# Altium PCB Route_Guide_and_Tuning.PcbDoc (part 6 of 8)
Units mil, origin at the board's own origin, x right, y up, seen from the top; angles counter-clockwise.
Board outline 3600 x 2300 mil, 14 copper layers (L1 TOP, L2_G, L3 SIG, L4_G, L4 SIG, L6_P, L7_G, L10_P, L11_P, L7 SIG, L13_P, L8 SIG, L15_G, L10 BOT), stack 89.291 mil thick; 4 components, 1934 nets, 2174 pads, 2165 vias.
Unrouted connection lines stored in the file: 123.
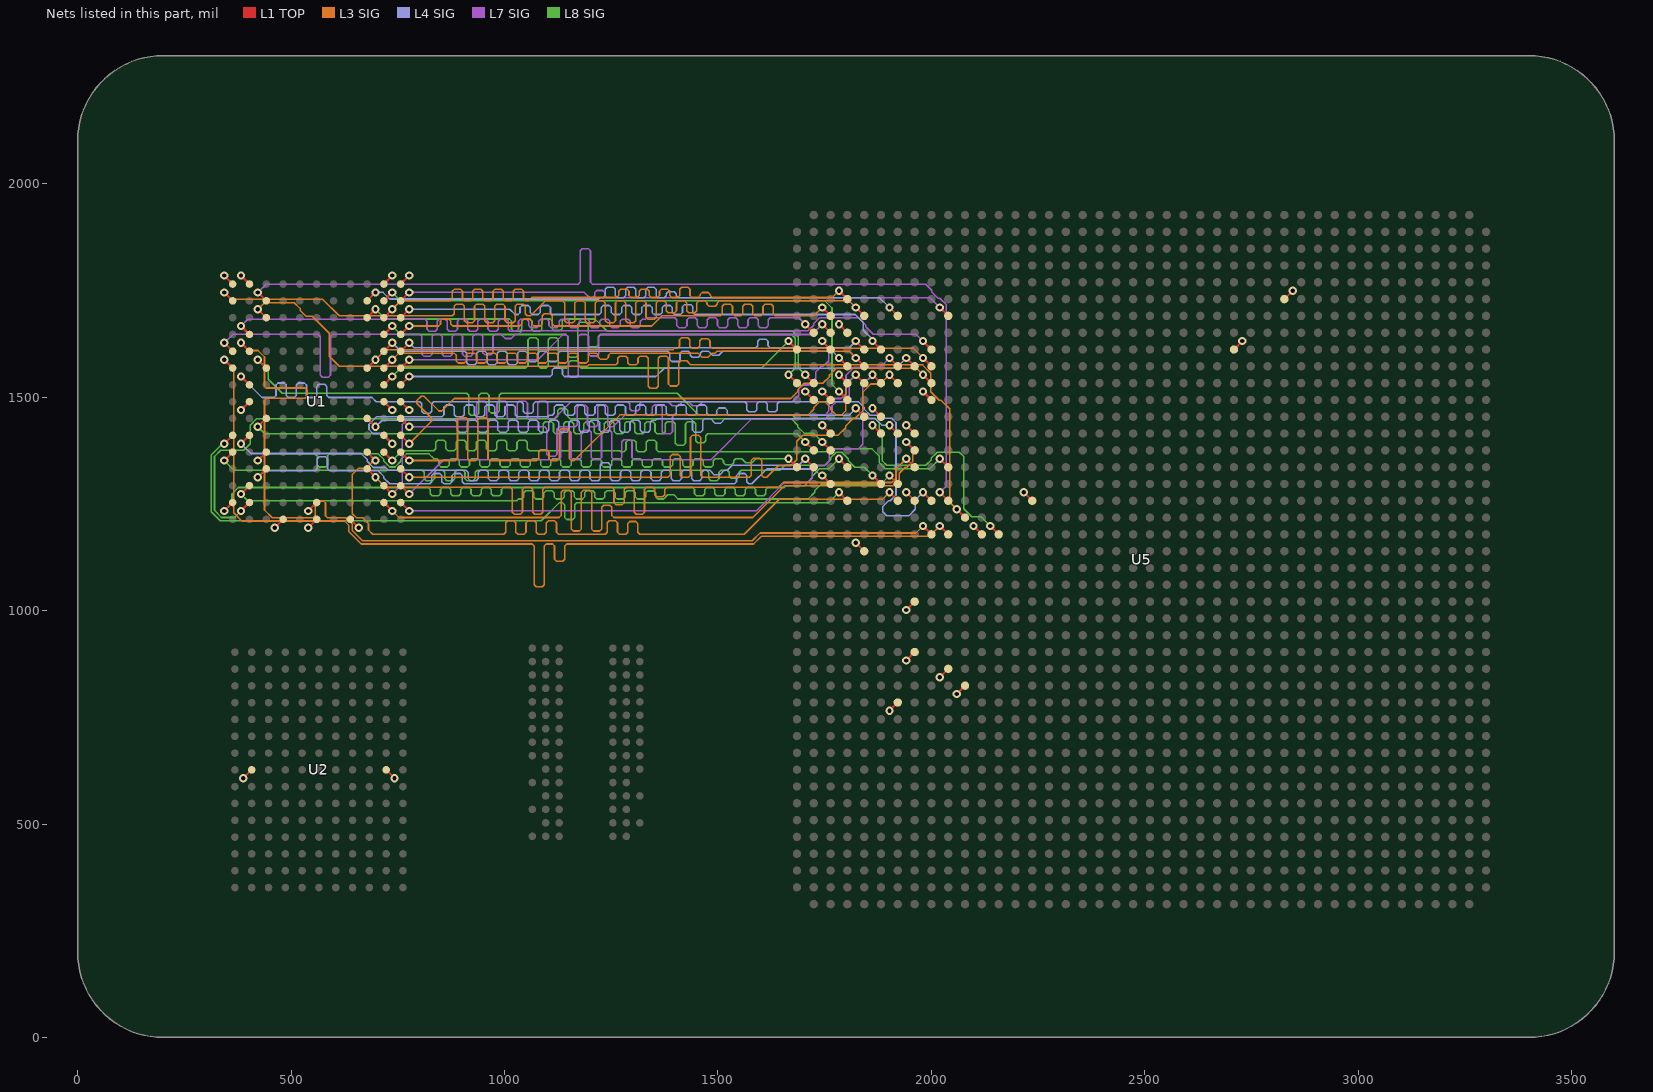
[diagram p18: the nets of this part, all layers, seen from the top]

## Via types
v1: diameter 19.4, hole 10, L1 TOP to L10 BOT, 2087 vias
v2: diameter 18.6, hole 10, L1 TOP to L10 BOT, tented both sides, 78 vias

## Nets (pads, with @x,y where several pads share a name; then routed paths per layer and width w, separated by ;. In a path a pad name is that pad's centre, name@x,y a point inside that pad or via, vN(x,y) a via of type N, cw(c..) or ccw(c..) an arc to the next point about the centre after c; other vN are vias at no path point) (continued)
QDR1.D26: U1.N2 U5.D37 | length 1428.9
  L1 TOP w5: U1.N2@717.6,1686.18 v1(737.28,1705.87) ; v1(1783.58,1749.29) U5.D37@1803.27,1729.61
  L3 SIG w3.8: v1(737.28,1705.87) 756.97,1725.55 873.21,1725.55 877.97,1730.31 877.97,1748.29 882.73,1753.05 897.01,1753.05 901.77,1748.29 901.77,1730.31 906.53,1725.55 920.81,1725.55 925.57,1730.31 925.57,1748.29 930.33,1753.05 944.61,1753.05 949.37,1748.29 949.37,1730.31 954.13,1725.55 968.41,1725.55 973.17,1730.31 973.17,1748.29 977.93,1753.05 992.21,1753.05 996.97,1748.29 996.97,1730.31 1001.73,1725.55 1016.01,1725.55 1020.77,1730.31 1020.77,1748.29 1025.53,1753.05 1039.81,1753.05 1044.57,1748.29 1044.57,1730.31 1049.33,1725.55 1056.47,1725.55 1064.26,1733.34 1263.07,1733.34 1267.83,1738.1 1267.83,1748.29 1272.59,1753.05 1286.87,1753.05 1291.63,1748.29 1291.63,1738.1 1296.39,1733.34 1310.67,1733.34 1315.43,1738.1 1315.43,1748.29 1320.19,1753.05 1334.47,1753.05 1339.23,1748.29 1339.23,1738.1 1343.99,1733.34 1358.27,1733.34 1363.03,1738.1 1363.03,1748.29 1367.79,1753.05 1382.07,1753.05 1386.83,1748.29 1386.83,1738.1 1391.59,1733.34 1405.87,1733.34 1410.63,1738.1 1410.63,1752.34 1415.39,1757.1 1429.67,1757.1 1434.43,1752.34 1434.43,1738.1 1439.19,1733.34 1453.47,1733.34 1458.23,1738.1 1458.23,1740.37 1462.99,1745.13 1477.27,1745.13 1482.03,1740.37 1482.03,1738.1 1486.79,1733.34 1767.63,1733.34 v1(1783.58,1749.29)
QDR1.D27: U1.C1 U5.E32 | length 1708.8
  L1 TOP w5: U1.C1@756.97,1292.48 v1(776.65,1272.79) ; v1(1822.95,1552.44) U5.E32@1842.64,1532.76
  L7 SIG w3.8: v1(776.65,1272.79) 857.42,1353.56 1127.27,1353.56 1132.03,1358.32 1132.03,1417.91 1136.79,1422.67 1151.07,1422.67 1155.83,1417.91 1155.83,1358.32 1160.59,1353.56 1174.87,1353.56 1179.63,1358.32 1179.63,1417.91 1184.39,1422.67 1198.67,1422.67 1203.43,1417.91 1203.43,1358.32 1208.19,1353.56 1222.47,1353.56 1227.23,1358.32 1227.23,1417.91 1231.99,1422.67 1246.27,1422.67 1251.03,1417.91 1251.03,1358.32 1255.79,1353.56 1270.07,1353.56 1274.83,1358.32 1274.83,1395.36 1279.59,1400.12 1293.87,1400.12 1298.63,1395.36 1298.63,1358.32 1303.39,1353.56 1483.57,1353.56 1579.73,1449.73 1752.77,1449.73 1767.21,1464.18 1767.21,1479.11 1777.21,1489.11 1792.15,1489.11 1807.54,1504.51 1807.54,1537.03 v1(1822.95,1552.44)
QDR1.D28: U1.D1 U5.G32 | length 1692.9
  L1 TOP w5: U1.D1@756.97,1331.85 v1(776.65,1312.16) ; v1(1901.69,1552.44) U5.G32@1921.38,1532.76
  L3 SIG w3.8: v1(776.65,1312.16) 1383.26,1312.16 1388.02,1316.92 1388.02,1360.77 1392.78,1365.53 1407.06,1365.53 1411.82,1360.77 1411.82,1316.92 1416.58,1312.16 1430.86,1312.16 1435.62,1316.92 1435.62,1405.6 1440.38,1410.36 1454.66,1410.36 1459.42,1405.6 1459.42,1316.92 1464.18,1312.16 1573.66,1312.16 1578.42,1316.92 1578.42,1352.15 1583.18,1356.91 1597.46,1356.91 1602.22,1352.15 1602.22,1316.92 1606.98,1312.16 1614.12,1312.16 1641.18,1339.22 1670.88,1339.22 1684.67,1353.01 1684.67,1396.57 1698.46,1410.36 1781.39,1410.36 1799.35,1428.32 1799.35,1432.51 1817.32,1450.47 1821.5,1450.47 1839.62,1468.6 1839.62,1512.15 1858.06,1530.59 1879.84,1530.59 v1(1901.69,1552.44)
QDR1.D29: U1.E2 U5.K27 | length 1659.5
  L1 TOP w5: U1.E2@717.6,1371.22 v1(737.28,1351.53) ; v1(2019.8,1355.59) U5.K27@2039.49,1335.91
  L8 SIG w3.8: v1(737.28,1351.53) 760.28,1374.53 834.22,1374.53 838.98,1379.29 838.98,1393.94 843.74,1398.7 858.02,1398.7 862.78,1393.94 862.78,1379.29 867.54,1374.53 881.82,1374.53 886.58,1379.29 886.58,1393.94 891.34,1398.7 905.62,1398.7 910.38,1393.94 910.38,1379.29 915.14,1374.53 929.42,1374.53 934.18,1379.29 934.18,1393.94 938.94,1398.7 953.22,1398.7 957.98,1393.94 957.98,1379.29 962.74,1374.53 977.02,1374.53 981.78,1379.29 981.78,1393.94 986.54,1398.7 1000.82,1398.7 1005.58,1393.94 1005.58,1379.29 1010.34,1374.53 1024.62,1374.53 1029.38,1379.29 1029.38,1393.94 1034.14,1398.7 1048.42,1398.7 1053.18,1393.94 1053.18,1379.29 1057.94,1374.53 1270.11,1374.53 1272.68,1371.96 1279.82,1371.96 1284.58,1376.72 1284.58,1393.94 1289.34,1398.7 1303.62,1398.7 1308.38,1393.94 1308.38,1376.72 1313.14,1371.96 1327.42,1371.96 1332.18,1376.72 1332.18,1393.94 1336.94,1398.7 1351.22,1398.7 1355.98,1393.94 1355.98,1376.72 1360.74,1371.96 1753.74,1371.96 1760.37,1378.59 1861.1,1378.59 1877.72,1361.97 1877.72,1347.03 1892.17,1332.59 1996.8,1332.59 v1(2019.8,1355.59)
QDR1.D30: U1.G1 U5.G33 | length 1708.8
  L1 TOP w5: U1.G1@756.97,1449.96 v1(776.65,1430.27) ; v1(1901.69,1591.81) U5.G33@1921.38,1572.13
  L7 SIG w3.8: v1(776.65,1430.27) 1094.59,1430.27 1099.35,1425.51 1099.35,1365.92 1104.11,1361.16 1118.39,1361.16 1123.15,1365.92 1123.15,1425.51 1127.91,1430.27 1165.99,1430.27 1170.75,1435.03 1170.75,1476.56 1175.51,1481.32 1189.79,1481.32 1194.55,1476.56 1194.55,1435.03 1199.31,1430.27 1213.59,1430.27 1218.35,1435.03 1218.35,1476.75 1223.11,1481.51 1237.39,1481.51 1242.15,1476.75 1242.15,1435.03 1246.91,1430.27 1254.05,1430.27 1282.07,1458.3 1341.23,1458.3 1345.99,1463.06 1345.99,1476.75 1350.75,1481.51 1365.03,1481.51 1369.79,1476.75 1369.79,1419.13 1374.55,1414.37 1388.83,1414.37 1393.59,1419.13 1393.59,1453.54 1398.35,1458.3 1750.59,1458.3 1759.61,1467.32 1759.61,1482.26 1774.06,1496.71 1789,1496.71 1799.94,1507.65 1799.94,1551.21 1818.75,1570.02 1879.9,1570.02 v1(1901.69,1591.81)
QDR1.D31: U1.J1 U5.H33 | length 1266.7
  L1 TOP w5: U1.J1@756.97,1528.7 v1(776.65,1548.39) ; v1(1941.06,1591.81) U5.H33@1960.75,1572.13
  L4 SIG w3.8: v1(776.65,1548.39) 1107.25,1548.39 1112.01,1553.15 1112.01,1563.5 1116.77,1568.26 1131.05,1568.26 1135.81,1563.5 1135.81,1553.15 1140.57,1548.39 1354.77,1548.39 1374.24,1567.85 1917.11,1567.85 v1(1941.06,1591.81)
QDR1.D32: U1.K2 U5.E33 | length 1428.9
  L1 TOP w5: U1.K2@717.6,1568.07 v1(737.28,1587.76) ; v1(1822.95,1591.81) U5.E33@1842.64,1572.13
  L3 SIG w3.8: v1(737.28,1587.76) 752.68,1603.16 881.97,1603.16 886.73,1598.4 886.73,1584.72 891.49,1579.96 905.77,1579.96 910.53,1584.72 910.53,1598.4 915.29,1603.16 929.57,1603.16 934.33,1598.4 934.33,1584.72 939.09,1579.96 953.37,1579.96 958.13,1584.72 958.13,1598.4 962.89,1603.16 977.17,1603.16 981.93,1598.4 981.93,1584.72 986.69,1579.96 1000.97,1579.96 1005.73,1584.72 1005.73,1598.4 1010.49,1603.16 1024.77,1603.16 1029.53,1598.4 1029.53,1584.72 1034.29,1579.96 1048.57,1579.96 1053.33,1584.72 1053.33,1598.4 1058.09,1603.16 1072.37,1603.16 1077.13,1598.4 1077.13,1584.72 1081.89,1579.96 1096.17,1579.96 1100.93,1584.72 1100.93,1598.4 1105.69,1603.16 1119.97,1603.16 1124.73,1598.4 1124.73,1584.72 1129.49,1579.96 1143.77,1579.96 1148.53,1584.72 1148.53,1598.4 1153.29,1603.16 1167.57,1603.16 1172.33,1598.4 1172.33,1584.72 1177.09,1579.96 1191.37,1579.96 1196.13,1584.72 1196.13,1598.4 1200.89,1603.16 1215.17,1603.16 1219.93,1598.4 1219.93,1593.08 1224.69,1588.32 1238.97,1588.32 1243.73,1593.08 1243.73,1598.4 1248.49,1603.16 1453.17,1603.16 1462.69,1593.64 1476.97,1593.64 1486.49,1603.16 1493.63,1603.16 1497.68,1607.21 1807.55,1607.21 v1(1822.95,1591.81)
QDR1.D33: U1.M1 U5.C36 | length 1262.2
  L1 TOP w5: U1.M1@756.97,1646.81 v1(776.65,1666.5) ; v1(1744.21,1709.92) U5.C36@1763.9,1690.24
  L3 SIG w3.8: v1(776.65,1666.5) 845.45,1666.5 850.21,1671.26 850.21,1678.11 854.97,1682.87 869.25,1682.87 874.01,1678.11 874.01,1671.26 878.77,1666.5 1035.85,1666.5 1040.61,1671.26 1040.61,1678.11 1045.37,1682.87 1059.65,1682.87 1064.41,1678.11 1064.41,1671.26 1069.17,1666.5 1083.45,1666.5 1088.21,1671.26 1088.21,1690.51 1092.97,1695.27 1107.25,1695.27 1112.01,1690.51 1112.01,1671.26 1116.77,1666.5 1345.25,1666.5 1368.99,1690.24 1505.57,1690.24 1510.33,1695 1510.33,1712.96 1515.09,1717.72 1529.37,1717.72 1534.13,1712.96 1534.13,1695 1538.89,1690.24 1553.17,1690.24 1557.93,1695 1557.93,1712.96 1562.69,1717.72 1576.97,1717.72 1581.73,1712.96 1581.73,1695 1586.49,1690.24 1600.77,1690.24 1605.53,1695 1605.53,1712.96 1610.29,1717.72 1624.57,1717.72 1629.33,1712.96 1629.33,1695 1634.09,1690.24 1724.53,1690.24 v1(1744.21,1709.92)
QDR1.D34: U1.N1 U5.F34 | length 1406.2
  L1 TOP w5: U1.N1@756.97,1686.18 v1(776.65,1705.87) ; v1(1862.32,1631.18) U5.F34@1882.01,1611.5
  L4 SIG w3.8: v1(776.65,1705.87) 1012.12,1705.87 1024.42,1693.57 1031.56,1693.57 1036.32,1698.33 1036.32,1709.88 1041.08,1714.64 1055.36,1714.64 1060.12,1709.88 1060.12,1698.33 1064.88,1693.57 1079.16,1693.57 1083.92,1698.33 1083.92,1709.88 1088.68,1714.64 1102.96,1714.64 1107.72,1709.88 1107.72,1698.33 1112.48,1693.57 1221.96,1693.57 1226.72,1698.33 1226.72,1709.88 1231.48,1714.64 1245.76,1714.64 1250.52,1709.88 1250.52,1698.33 1255.28,1693.57 1269.56,1693.57 1274.32,1698.33 1274.32,1709.88 1279.08,1714.64 1293.36,1714.64 1298.12,1709.88 1298.12,1698.33 1302.88,1693.57 1317.16,1693.57 1321.92,1698.33 1321.92,1709.88 1326.68,1714.64 1340.96,1714.64 1345.72,1709.88 1345.72,1698.33 1350.48,1693.57 1364.76,1693.57 1369.52,1698.33 1369.52,1709.88 1374.28,1714.64 1388.56,1714.64 1393.32,1709.88 1393.32,1698.33 1398.08,1693.57 1412.36,1693.57 1417.12,1698.33 1417.12,1712.01 1421.88,1716.77 1436.16,1716.77 1440.92,1712.01 1440.92,1698.33 1445.68,1693.57 1821.72,1693.57 1840.53,1674.76 1840.53,1656.88 1862.32,1635.09 v1(1862.32,1631.18)
QDR1.D35: U1.P2 U5.D31 | length 1303.2
  L1 TOP w5: U1.P2@717.6,1725.55 v1(737.28,1745.24) ; v1(1783.58,1513.07) U5.D31@1803.27,1493.39
  L8 SIG w3.8: v1(737.28,1745.24) 757.19,1725.34 1750.58,1725.34 1767.21,1708.7 1767.21,1529.44 v1(1783.58,1513.07)
QDR1.DOFFN: U1.H1 U5.R25 | length 55.7
  L1 TOP w5: U1.H1@756.97,1489.33 v1(776.65,1469.64) ; v1(2216.65,1276.85) U5.R25@2236.34,1257.17
QDR1.K: U1.B6 U5.B31 | length 55.7
  L1 TOP w5: v1(540.43,1233.42) U1.B6@560.12,1253.11 ; v1(1704.84,1513.07) U5.B31@1724.53,1493.39
QDR1.KN: U1.A6 U5.F30 | length 55.7
  L1 TOP w5: v1(540.43,1194.05) U1.A6@560.12,1213.74 ; v1(1862.32,1473.7) U5.F30@1882.01,1454.02
QDR1.Q0: U1.P11 U5.E36 | length 2393.2
  L1 TOP w5: v1(343.58,1745.24) U1.P11@363.27,1725.55 ; v1(1822.95,1709.92) U5.E36@1842.64,1690.24
  L3 SIG w3.8: v1(343.58,1745.24) 359.95,1728.87 574.4,1728.87 612.8,1690.47 877.5,1690.47 882.26,1695.23 882.26,1713.19 887.02,1717.95 901.3,1717.95 906.06,1713.19 906.06,1678.86 910.82,1674.1 925.1,1674.1 929.86,1678.86 929.86,1713.19 934.62,1717.95 948.9,1717.95 953.66,1713.19 953.66,1678.86 958.42,1674.1 972.7,1674.1 977.46,1678.86 977.46,1713.19 982.22,1717.95 996.5,1717.95 1001.26,1713.19 1001.26,1678.86 1006.02,1674.1 1020.3,1674.1 1025.06,1678.86 1025.06,1713.19 1029.82,1717.95 1044.1,1717.95 1048.86,1713.19 1048.86,1695.23 1053.62,1690.47 1060.76,1690.47 1095.61,1725.32 1136.39,1725.32 1141.15,1720.56 1141.15,1678.86 1145.91,1674.1 1160.19,1674.1 1164.95,1678.86 1164.95,1720.56 1169.71,1725.32 1183.99,1725.32 1188.75,1720.56 1188.75,1678.86 1193.51,1674.1 1207.79,1674.1 1212.55,1678.86 1212.55,1720.56 1217.31,1725.32 1231.59,1725.32 1236.35,1720.56 1236.35,1678.86 1241.11,1674.1 1255.39,1674.1 1260.15,1678.86 1260.15,1720.56 1264.91,1725.32 1279.19,1725.32 1283.95,1720.56 1283.95,1678.86 1288.71,1674.1 1302.99,1674.1 1307.75,1678.86 1307.75,1720.56 1312.51,1725.32 1326.79,1725.32 1331.55,1720.56 1331.55,1687.34 1336.31,1682.58 1350.59,1682.58 1355.35,1687.34 1355.35,1720.56 1360.11,1725.32 1374.39,1725.32 1379.15,1720.56 1379.15,1702.6 1383.91,1697.84 1398.19,1697.84 1402.95,1702.6 1402.95,1720.56 1407.71,1725.32 1421.99,1725.32 1426.75,1720.56 1426.75,1702.6 1431.51,1697.84 1445.79,1697.84 1450.55,1702.6 1450.55,1720.56 1455.31,1725.32 1469.59,1725.32 1474.35,1720.56 1474.35,1717.51 1479.11,1712.75 1493.39,1712.75 1498.15,1717.51 1498.15,1720.56 1502.91,1725.32 1807.55,1725.32 v1(1822.95,1709.92)
QDR1.Q1: U1.M10 U5.B35 | length 1962.3
  L1 TOP w5: v1(382.95,1666.5) U1.M10@402.64,1646.81 ; v1(1704.84,1670.55) U5.B35@1724.53,1650.87
  L7 SIG w3.8: v1(382.95,1666.5) 398.91,1682.45 813.81,1682.45 818.57,1677.69 818.57,1659.17 823.33,1654.41 837.61,1654.41 842.37,1659.17 842.37,1677.69 847.13,1682.45 861.41,1682.45 866.17,1677.69 866.17,1659.17 870.93,1654.41 885.21,1654.41 889.97,1659.17 889.97,1677.69 894.73,1682.45 909.01,1682.45 913.77,1677.69 913.77,1659.17 918.53,1654.41 932.81,1654.41 937.57,1659.17 937.57,1677.69 942.33,1682.45 956.61,1682.45 961.37,1677.69 961.37,1659.17 966.13,1654.41 980.41,1654.41 985.17,1659.17 985.17,1677.69 989.93,1682.45 1004.21,1682.45 1008.97,1677.69 1008.97,1659.17 1013.73,1654.41 1028.01,1654.41 1032.77,1659.17 1032.77,1677.69 1037.53,1682.45 1051.81,1682.45 1056.57,1677.69 1056.57,1667.51 1061.33,1662.75 1075.61,1662.75 1080.37,1667.51 1080.37,1677.69 1085.13,1682.45 1099.41,1682.45 1104.17,1677.69 1104.17,1667.51 1108.93,1662.75 1123.21,1662.75 1127.97,1667.51 1127.97,1677.69 1132.73,1682.45 1147.01,1682.45 1151.77,1677.69 1151.77,1667.51 1156.53,1662.75 1170.81,1662.75 1175.57,1667.51 1175.57,1677.69 1180.33,1682.45 1194.61,1682.45 1199.37,1677.69 1199.37,1667.51 1204.13,1662.75 1218.41,1662.75 1223.17,1667.51 1223.17,1677.69 1227.93,1682.45 1242.21,1682.45 1246.97,1677.69 1246.97,1667.51 1251.73,1662.75 1266.01,1662.75 1270.77,1667.51 1270.77,1677.69 1275.53,1682.45 1289.81,1682.45 1294.57,1677.69 1294.57,1667.51 1299.33,1662.75 1313.61,1662.75 1318.37,1667.51 1318.37,1677.69 1323.13,1682.45 1330.27,1682.45 1333.77,1685.95 1399.08,1685.95 1403.84,1681.19 1403.84,1667.51 1408.6,1662.75 1422.88,1662.75 1427.64,1667.51 1427.64,1681.19 1432.4,1685.95 1446.68,1685.95 1451.44,1681.19 1451.44,1667.51 1456.2,1662.75 1470.48,1662.75 1475.24,1667.51 1475.24,1681.19 1480,1685.95 1494.28,1685.95 1499.04,1681.19 1499.04,1667.51 1503.8,1662.75 1518.08,1662.75 1522.84,1667.51 1522.84,1681.19 1527.6,1685.95 1541.88,1685.95 1546.64,1681.19 1546.64,1667.51 1551.4,1662.75 1565.68,1662.75 1570.44,1667.51 1570.44,1681.19 1575.2,1685.95 1589.48,1685.95 1594.24,1681.19 1594.24,1667.51 1599,1662.75 1613.28,1662.75 1618.04,1667.51 1618.04,1681.19 1622.8,1685.95 1689.44,1685.95 v1(1704.84,1670.55)
QDR1.Q2: U1.L11 U5.J34 | length 2300.1
  L1 TOP w5: v1(343.58,1627.13) U1.L11@363.27,1607.44 ; v1(1980.43,1631.18) U5.J34@2000.12,1611.5
  L7 SIG w3.8: v1(343.58,1627.13) 363.27,1646.81 563.81,1646.81 568.57,1642.05 568.57,1551.57 573.33,1546.81 587.61,1546.81 592.37,1551.57 592.37,1642.05 597.13,1646.81 801.81,1646.81 806.57,1642.05 806.57,1600.12 811.33,1595.36 825.61,1595.36 830.37,1600.12 830.37,1642.05 835.13,1646.81 849.41,1646.81 854.17,1642.05 854.17,1600.12 858.93,1595.36 873.21,1595.36 877.97,1600.12 877.97,1642.05 882.73,1646.81 897.01,1646.81 901.77,1642.05 901.77,1600.12 906.53,1595.36 920.81,1595.36 925.57,1600.12 925.57,1642.05 930.33,1646.81 944.61,1646.81 949.37,1642.05 949.37,1604.17 954.13,1599.41 968.41,1599.41 973.17,1604.17 973.17,1642.05 977.93,1646.81 992.21,1646.81 1001.73,1637.29 1016.01,1637.29 1025.53,1646.81 1032.67,1646.81 1041.01,1655.15 1711.22,1655.15 1724.53,1668.46 1724.53,1672.65 1737.83,1685.95 1829.33,1685.95 1846.44,1668.85 1846.44,1664.66 1863.54,1647.55 1964.06,1647.55 v1(1980.43,1631.18)
QDR1.Q3: U1.K11 U5.K23 | length 2393.2
  L1 TOP w5: v1(343.58,1587.76) U1.K11@363.27,1568.07 ; v1(2019.8,1198.11) U5.K23@2039.49,1178.43
  L3 SIG w3.8: v1(343.58,1587.76) 365.67,1565.67 365.67,1228.93 384.78,1209.82 625.19,1209.82 635.54,1199.46 635.54,1184.53 664.22,1155.85 1064.84,1155.85 1069.6,1151.09 1069.6,1060.61 1074.36,1055.85 1088.64,1055.85 1093.4,1060.61 1093.4,1151.09 1098.16,1155.85 1112.44,1155.85 1117.2,1151.09 1117.2,1120.03 1121.96,1115.27 1136.24,1115.27 1141,1120.03 1141,1151.09 1145.76,1155.85 1583.56,1155.85 1601.85,1174.14 1995.83,1174.14 v1(2019.8,1198.11)
QDR1.Q4: U1.J10 U5.J25 | length 2317.9
  L1 TOP w5: v1(382.95,1548.39) U1.J10@402.64,1528.7 ; v1(1980.43,1276.85) U5.J25@2000.12,1257.17
  L4 SIG w3.8: v1(382.95,1548.39) 432.21,1499.13 459.95,1499.13 464.71,1503.89 464.71,1528.23 469.47,1532.99 483.75,1532.99 488.51,1528.23 488.51,1503.89 493.27,1499.13 507.55,1499.13 512.31,1503.89 512.31,1528.23 517.07,1532.99 531.35,1532.99 536.11,1528.23 536.11,1503.89 540.87,1499.13 555.15,1499.13 559.91,1503.89 559.91,1525.07 564.67,1529.83 578.95,1529.83 583.71,1525.07 583.71,1503.89 588.47,1499.13 689.81,1499.13 699.83,1489.1 801.17,1489.1 805.93,1484.34 805.93,1466.6 810.69,1461.84 824.97,1461.84 829.73,1466.6 829.73,1484.34 834.49,1489.1 1039.17,1489.1 1043.93,1484.34 1043.93,1466.6 1048.69,1461.84 1062.97,1461.84 1067.73,1466.6 1067.73,1484.34 1072.49,1489.1 1562.77,1489.1 1567.53,1484.34 1567.53,1470.11 1572.29,1465.35 1586.57,1465.35 1591.33,1470.11 1591.33,1484.34 1596.09,1489.1 1610.37,1489.1 1615.13,1484.34 1615.13,1470.11 1619.89,1465.35 1634.17,1465.35 1638.93,1470.11 1638.93,1484.34 1643.69,1489.1 1829.33,1489.1 1843.12,1475.31 1843.12,1471.12 1856.91,1457.33 1871.85,1457.33 1878.48,1450.7 1907.1,1450.7 1917.09,1440.71 1917.09,1270.47 1903.79,1257.17 1899.6,1257.17 1886.29,1243.86 1886.29,1231.1 1895.31,1222.08 1947.44,1222.08 1962.44,1237.08 1962.44,1258.86 v1(1980.43,1276.85)
QDR1.Q5: U1.F11 U5.D25 | length 1804.6
  L1 TOP w5: v1(343.58,1390.9) U1.F11@363.27,1410.59 ; v1(1783.58,1276.85) U5.D25@1803.27,1257.17
  L8 SIG w3.8: v1(343.58,1390.9) 339.68,1390.9 312.98,1364.21 312.98,1231.5 334.05,1210.42 1086.45,1210.42 1128.91,1252.88 1136.05,1252.88 1140.81,1248.12 1140.81,1218.19 1145.57,1213.43 1159.85,1213.43 1164.61,1218.19 1164.61,1248.12 1169.37,1252.88 1759.61,1252.88 v1(1783.58,1276.85)
QDR1.Q6: U1.E11 U5.F26 | length 1804.6
  L1 TOP w5: v1(343.58,1351.53) U1.E11@363.27,1371.22 ; v1(1862.32,1316.22) U5.F26@1882.01,1296.54
  L8 SIG w3.8: v1(343.58,1351.53) 366.58,1328.53 807.5,1328.53 812.26,1323.77 812.26,1309.12 817.02,1304.36 831.3,1304.36 836.06,1309.12 836.06,1323.77 840.82,1328.53 855.1,1328.53 859.86,1323.77 859.86,1309.12 864.62,1304.36 878.9,1304.36 883.66,1309.12 883.66,1323.77 888.42,1328.53 902.7,1328.53 907.46,1323.77 907.46,1309.12 912.22,1304.36 926.5,1304.36 931.26,1309.12 931.26,1323.77 936.02,1328.53 1473.9,1328.53 1478.66,1323.77 1478.66,1309.12 1483.42,1304.36 1497.7,1304.36 1502.46,1309.12 1502.46,1323.77 1507.22,1328.53 1521.5,1328.53 1526.26,1323.77 1526.26,1314.34 1531.02,1309.58 1545.3,1309.58 1550.06,1314.34 1550.06,1323.77 1554.82,1328.53 1645.26,1328.53 1656.9,1340.18 1750.58,1340.18 1763.89,1353.49 1763.89,1357.68 1777.2,1370.99 1789.96,1370.99 1805.4,1355.55 1805.4,1351.37 1820.84,1335.93 1842.62,1335.93 v1(1862.32,1316.22)
QDR1.Q7: U1.C10 U5.G26 | length 1804.6
  L1 TOP w5: v1(382.95,1272.79) U1.C10@402.64,1292.48 ; v1(1901.69,1316.22) U5.G26@1921.38,1296.54
  L8 SIG w3.8: v1(382.95,1272.79) 398.35,1257.39 1028.86,1257.39 1032.91,1261.44 1040.05,1261.44 1044.81,1266.2 1044.81,1275.85 1049.57,1280.61 1063.85,1280.61 1068.61,1275.85 1068.61,1266.2 1073.37,1261.44 1087.65,1261.44 1092.41,1266.2 1092.41,1275.85 1097.17,1280.61 1111.45,1280.61 1116.21,1275.85 1116.21,1266.2 1120.97,1261.44 1135.25,1261.44 1140.01,1266.2 1140.01,1275.85 1144.77,1280.61 1159.05,1280.61 1163.81,1275.85 1163.81,1266.2 1168.57,1261.44 1182.85,1261.44 1187.61,1266.2 1187.61,1275.85 1192.37,1280.61 1206.65,1280.61 1211.41,1275.85 1211.41,1266.2 1216.17,1261.44 1230.45,1261.44 1235.21,1266.2 1235.21,1275.85 1239.97,1280.61 1254.25,1280.61 1259.01,1275.85 1259.01,1266.2 1263.77,1261.44 1278.05,1261.44 1282.81,1266.2 1282.81,1275.85 1287.57,1280.61 1301.85,1280.61 1306.61,1275.85 1306.61,1266.2 1311.37,1261.44 1325.65,1261.44 1330.41,1266.2 1330.41,1275.29 1335.17,1280.05 1349.45,1280.05 1354.21,1275.29 1354.21,1266.2 1358.97,1261.44 1373.25,1261.44 1382.77,1270.96 1397.05,1270.96 1406.57,1261.44 1711.21,1261.44 1726.65,1276.88 1726.65,1281.07 1742.1,1296.51 1881.98,1296.51 v1(1901.69,1316.22)
QDR1.Q8: U1.B11 U5.D27 | length 1778.9
  L1 TOP w5: v1(343.58,1233.42) U1.B11@363.27,1253.11 ; v1(1783.58,1355.59) U5.D27@1803.27,1335.91
  L8 SIG w3.8: v1(343.58,1233.42) 361.58,1251.42 361.58,1273.2 376.59,1288.21 821.6,1288.21 826.36,1283.45 826.36,1273.8 831.12,1269.04 845.4,1269.04 850.16,1273.8 850.16,1283.45 854.92,1288.21 869.2,1288.21 873.96,1283.45 873.96,1273.8 878.72,1269.04 893,1269.04 897.76,1273.8 897.76,1283.45 902.52,1288.21 916.8,1288.21 921.56,1283.45 921.56,1273.8 926.32,1269.04 940.6,1269.04 945.36,1273.8 945.36,1283.45 950.12,1288.21 964.4,1288.21 969.16,1283.45 969.16,1273.8 973.92,1269.04 988.2,1269.04 992.96,1273.8 992.96,1283.45 997.72,1288.21 1440.4,1288.21 1445.16,1283.45 1445.16,1273.8 1449.92,1269.04 1464.2,1269.04 1468.96,1273.8 1468.96,1283.45 1473.72,1288.21 1488,1288.21 1492.76,1283.45 1492.76,1273.8 1497.52,1269.04 1511.8,1269.04 1516.56,1273.8 1516.56,1283.45 1521.32,1288.21 1535.6,1288.21 1540.36,1283.45 1540.36,1273.8 1545.12,1269.04 1559.4,1269.04 1564.16,1273.8 1564.16,1283.45 1568.92,1288.21 1583.2,1288.21 1587.96,1283.45 1587.96,1273.8 1592.72,1269.04 1607,1269.04 1611.76,1273.8 1611.76,1283.45 1616.52,1288.21 1655.05,1288.21 1659.09,1292.25 1702.65,1292.25 1720.72,1310.32 1720.72,1314.51 1738.79,1332.58 1760.57,1332.58 v1(1783.58,1355.59)
QDR1.Q9: U1.P9 U5.K25 | length 2300.1
  L1 TOP w5: v1(422.32,1745.24) U1.P9@442.01,1725.55 ; v1(2019.8,1276.85) U5.K25@2039.49,1257.17
  L7 SIG w3.8: v1(422.32,1745.24) 441.78,1764.69 1172.85,1764.69 1177.61,1769.45 1177.61,1843.11 1182.37,1847.87 1196.65,1847.87 1201.41,1843.11 1201.41,1769.45 1206.17,1764.69 1986.81,1764.69 2001.19,1750.32 2001.19,1746.13 2015.57,1731.75 2019.75,1731.75 2035.2,1716.3 2035.2,1292.25 v1(2019.8,1276.85)
QDR1.Q10: U1.N9 U5.L24 | length 2393.2
  L1 TOP w5: v1(422.32,1705.87) U1.N9@442.01,1686.18 ; v1(2059.17,1237.48) U5.L24@2078.86,1217.8
  L3 SIG w3.8: v1(422.32,1705.87) 437.72,1721.27 507.44,1721.27 521.23,1707.48 521.23,1703.29 535.02,1689.5 549.96,1689.5 589.69,1649.76 589.69,1595.46 612.8,1572.36 1194.52,1572.36 1197.6,1575.44 1260.45,1575.44 1265.21,1580.2 1265.21,1590.8 1269.97,1595.56 1284.25,1595.56 1289.01,1590.8 1289.01,1580.2 1293.77,1575.44 1308.05,1575.44 1312.81,1580.2 1312.81,1590.8 1317.57,1595.56 1331.85,1595.56 1336.61,1590.8 1336.61,1525.43 1341.37,1520.67 1355.65,1520.67 1360.41,1525.43 1360.41,1590.8 1365.17,1595.56 1379.45,1595.56 1384.21,1590.8 1384.21,1530.8 1388.97,1526.04 1403.25,1526.04 1408.01,1530.8 1408.01,1580.2 1412.77,1584.96 1427.05,1584.96 1436.57,1575.44 1979.21,1575.44 1998.81,1555.84 1998.81,1512.28 2018.42,1492.68 2022.6,1492.68 2042.8,1472.48 2042.8,1253.85 v1(2059.17,1237.48)
QDR1.Q11: U1.L10 U5.J23 | length 2334.7
  L1 TOP w5: v1(382.95,1627.13) U1.L10@402.64,1607.44 ; v1(1980.43,1198.11) U5.J23@2000.12,1178.43
  L3 SIG w3.8: v1(382.95,1627.13) 400.94,1609.14 422.72,1609.14 437.72,1594.14 437.72,1525.97 442.48,1521.21 532.96,1521.21 537.72,1516.45 537.72,1502.17 532.96,1497.41 442.48,1497.41 437.72,1492.65 437.72,1235.62 455.92,1217.42 552.17,1217.42 556.93,1222.18 556.93,1252.01 561.69,1256.77 575.97,1256.77 580.73,1252.01 580.73,1222.18 585.49,1217.42 628.33,1217.42 643.14,1202.61 643.14,1187.68 667.37,1163.45 1580.41,1163.45 1598.7,1181.74 1964.06,1181.74 v1(1980.43,1198.11)
QDR1.Q12: U1.K9 U5.N23 | length 2267.4
  L1 TOP w5: v1(422.32,1587.76) U1.K9@442.01,1568.07 ; v1(2137.91,1198.11) U5.N23@2157.6,1178.43
  L8 SIG w3.8: v1(422.32,1587.76) 446.29,1563.79 446.29,1542.01 479.28,1509.02 911.49,1509.02 916.25,1504.26 916.25,1462.09 921.01,1457.33 935.29,1457.33 940.05,1462.09 940.05,1504.26 944.81,1509.02 959.09,1509.02 963.85,1504.26 963.85,1467.41 968.61,1462.65 982.89,1462.65 987.65,1467.41 987.65,1504.26 992.41,1509.02 1404.49,1509.02 1455.2,1458.3 1674.03,1458.3 1681.63,1450.7 1867.73,1450.7 1877.72,1440.71 1877.72,1425.78 1885.32,1418.18 1885.32,1350.18 1895.31,1340.19 1986.81,1340.19 2000.12,1353.5 2000.12,1357.69 2013.42,1370.99 2065.55,1370.99 2075.53,1361.01 2075.53,1238.71 2094.34,1219.9 2116.12,1219.9 v1(2137.91,1198.11)
QDR1.Q13: U1.G9 U5.B28 | length 1804.6
  L1 TOP w5: v1(422.32,1430.27) U1.G9@442.01,1449.96 ; v1(1704.84,1394.96) U5.B28@1724.53,1375.28
  L8 SIG w3.8: v1(422.32,1430.27) 438.69,1413.9 1086.14,1413.9 1090.9,1418.66 1090.9,1437.37 1095.66,1442.13 1109.94,1442.13 1114.7,1437.37 1114.7,1418.66 1119.46,1413.9 1133.74,1413.9 1138.5,1418.66 1138.5,1437.37 1143.26,1442.13 1157.54,1442.13 1162.3,1437.37 1162.3,1418.66 1167.06,1413.9 1181.34,1413.9 1186.1,1418.66 1186.1,1437.37 1190.86,1442.13 1205.14,1442.13 1209.9,1437.37 1209.9,1418.66 1214.66,1413.9 1228.94,1413.9 1233.7,1418.66 1233.7,1437.37 1238.46,1442.13 1252.74,1442.13 1257.5,1437.37 1257.5,1418.66 1262.26,1413.9 1276.54,1413.9 1281.3,1418.66 1281.3,1437.37 1286.06,1442.13 1300.34,1442.13 1305.1,1437.37 1305.1,1418.66 1309.86,1413.9 1324.14,1413.9 1328.9,1418.66 1328.9,1437.37 1333.66,1442.13 1347.94,1442.13 1352.7,1437.37 1352.7,1418.66 1357.46,1413.9 1371.74,1413.9 1376.5,1418.66 1376.5,1437.37 1381.26,1442.13 1395.54,1442.13 1400.3,1437.37 1400.3,1391.92 1405.06,1387.16 1419.34,1387.16 1424.1,1391.92 1424.1,1437.37 1428.86,1442.13 1443.14,1442.13 1447.9,1437.37 1447.9,1397.92 1452.66,1393.16 1466.94,1393.16 1471.7,1397.92 1471.7,1409.14 1476.46,1413.9 1685.9,1413.9 v1(1704.84,1394.96)
QDR1.Q14: U1.F10 U5.B27 | length 1907.7
  L1 TOP w5: v1(382.95,1390.9) U1.F10@402.64,1410.59 ; v1(1704.84,1355.59) U5.B27@1724.53,1335.91
  L4 SIG w3.8: v1(382.95,1390.9) 405.95,1367.9 663.95,1367.9 678.23,1353.63 678.23,1349.44 692.51,1335.16 721.13,1335.16 727.76,1328.53 910.01,1328.53 914.77,1323.77 914.77,1309.12 919.53,1304.36 933.81,1304.36 938.57,1309.12 938.57,1323.77 943.33,1328.53 957.61,1328.53 962.37,1323.77 962.37,1309.12 967.13,1304.36 981.41,1304.36 986.17,1309.12 986.17,1323.77 990.93,1328.53 1005.21,1328.53 1009.97,1323.77 1009.97,1309.12 1014.73,1304.36 1029.01,1304.36 1033.77,1309.12 1033.77,1323.77 1038.53,1328.53 1052.81,1328.53 1057.57,1323.77 1057.57,1309.12 1062.33,1304.36 1076.61,1304.36 1081.37,1309.12 1081.37,1323.77 1086.13,1328.53 1100.41,1328.53 1105.17,1323.77 1105.17,1309.12 1109.93,1304.36 1124.21,1304.36 1128.97,1309.12 1128.97,1323.77 1133.73,1328.53 1148.01,1328.53 1152.77,1323.77 1152.77,1309.12 1157.53,1304.36 1171.81,1304.36 1176.57,1309.12 1176.57,1323.77 1181.33,1328.53 1195.61,1328.53 1200.37,1323.77 1200.37,1309.12 1205.13,1304.36 1219.41,1304.36 1224.17,1309.12 1224.17,1341.18 1228.93,1345.95 1243.21,1345.95 1247.97,1341.18 1247.97,1309.12 1252.73,1304.36 1267.01,1304.36 1271.77,1309.12 1271.77,1323.77 1276.53,1328.53 1290.81,1328.53 1295.57,1323.77 1295.57,1309.12 1300.33,1304.36 1314.61,1304.36 1319.37,1309.12 1319.37,1323.77 1324.13,1328.53 1338.41,1328.53 1343.17,1323.77 1343.17,1309.12 1347.93,1304.36 1362.21,1304.36 1366.97,1309.12 1366.97,1323.77 1371.73,1328.53 1386.01,1328.53 1390.77,1323.77 1390.77,1309.12 1395.53,1304.36 1409.81,1304.36 1414.57,1309.12 1414.57,1323.77 1419.33,1328.53 1433.61,1328.53 1438.37,1323.77 1438.37,1309.12 1443.13,1304.36 1457.41,1304.36 1462.17,1309.12 1462.17,1323.77 1466.93,1328.53 1481.21,1328.53 1485.97,1323.77 1485.97,1322.92 1490.73,1318.16 1505.01,1318.16 1509.77,1322.92 1509.77,1323.77 1514.53,1328.53 1521.67,1328.53 1533.32,1340.19 1689.44,1340.19 v1(1704.84,1355.59)
QDR1.Q15: U1.E9 U5.A27 | length 1804.6
  L1 TOP w5: v1(422.32,1351.53) U1.E9@442.01,1371.22 ; v1(1665.47,1355.59) U5.A27@1685.16,1335.91
  L8 SIG w3.8: v1(422.32,1351.53) 437.72,1366.93 556.73,1366.93 561.49,1362.18 561.49,1340.89 566.25,1336.13 580.53,1336.13 585.29,1340.89 585.29,1362.18 590.05,1366.93 704.29,1366.93 717.6,1353.63 717.6,1349.44 730.91,1336.13 743.66,1336.13 756.97,1349.44 756.97,1353.63 770.28,1366.93 823.33,1366.93 834.67,1355.59 841.81,1355.59 846.57,1350.83 846.57,1340.89 851.33,1336.13 865.61,1336.13 870.37,1340.89 870.37,1350.83 875.13,1355.59 889.41,1355.59 894.17,1350.83 894.17,1340.89 898.93,1336.13 913.21,1336.13 917.97,1340.89 917.97,1350.83 922.73,1355.59 937.01,1355.59 941.77,1350.83 941.77,1340.89 946.53,1336.13 960.81,1336.13 965.57,1340.89 965.57,1350.83 970.33,1355.59 984.61,1355.59 989.37,1350.83 989.37,1340.89 994.13,1336.13 1008.41,1336.13 1013.17,1340.89 1013.17,1350.83 1017.93,1355.59 1032.21,1355.59 1036.97,1350.83 1036.97,1340.89 1041.73,1336.13 1056.01,1336.13 1060.77,1340.89 1060.77,1350.83 1065.53,1355.59 1079.81,1355.59 1084.57,1350.83 1084.57,1340.89 1089.33,1336.13 1103.61,1336.13 1108.37,1340.89 1108.37,1350.83 1113.13,1355.59 1127.41,1355.59 1132.17,1350.83 1132.17,1340.89 1136.93,1336.13 1151.21,1336.13 1155.97,1340.89 1155.97,1350.83 1160.73,1355.59 1175.01,1355.59 1179.77,1350.83 1179.77,1340.89 1184.53,1336.13 1198.81,1336.13 1203.57,1340.89 1203.57,1350.83 1208.33,1355.59 1222.61,1355.59 1227.37,1350.83 1227.37,1340.89 1232.13,1336.13 1246.41,1336.13 1251.17,1340.89 1251.17,1350.83 1255.93,1355.59 1270.21,1355.59 1274.97,1350.83 1274.97,1340.89 1279.73,1336.13 1294.01,1336.13 1298.77,1340.89 1298.77,1350.83 1303.53,1355.59 1317.81,1355.59 1322.57,1350.83 1322.57,1340.89 1327.33,1336.13 1341.61,1336.13 1346.37,1340.89 1346.37,1350.83 1351.13,1355.59 1365.41,1355.59 1370.17,1350.83 1370.17,1340.89 1374.93,1336.13 1389.21,1336.13 1393.97,1340.89 1393.97,1350.83 1398.73,1355.59 1413.01,1355.59 1417.77,1350.83 1417.77,1340.89 1422.53,1336.13 1436.81,1336.13 1441.57,1340.89 1441.57,1350.83 1446.33,1355.59 1460.61,1355.59 1465.37,1350.83 1465.37,1340.89 1470.13,1336.13 1484.41,1336.13 1489.17,1340.89 1489.17,1350.83 1493.93,1355.59 1508.21,1355.59 1512.97,1350.83 1512.97,1346.1 1517.73,1341.34 1532.01,1341.34 1536.77,1346.1 1536.77,1350.83 1541.53,1355.59 1555.81,1355.59 1565.33,1346.07 1579.61,1346.07 1589.13,1355.59 v1(1665.47,1355.59)
QDR1.Q16: U1.D9 U5.C26 | length 1585.8
  L1 TOP w5: v1(422.32,1312.16) U1.D9@442.01,1331.85 ; v1(1744.21,1316.22) U5.C26@1763.9,1296.54
  L4 SIG w3.8: v1(422.32,1312.16) 437.72,1327.56 556.73,1327.56 561.49,1332.32 561.49,1355.53 566.25,1360.29 580.53,1360.29 585.29,1355.53 585.29,1332.32 590.05,1327.56 704.29,1327.56 717.6,1314.26 717.6,1310.07 730.91,1296.76 824.77,1296.76 829.53,1301.52 829.53,1316.17 834.29,1320.93 848.57,1320.93 853.33,1316.17 853.33,1301.52 858.09,1296.76 872.37,1296.76 877.13,1301.52 877.13,1316.17 881.89,1320.93 896.17,1320.93 900.93,1316.17 900.93,1301.52 905.69,1296.76 1538.77,1296.76 1543.53,1301.52 1543.53,1316.17 1548.29,1320.93 1562.57,1320.93 1567.33,1316.17 1567.33,1301.52 1572.09,1296.76 1579.23,1296.76 1614.09,1331.62 1724.91,1331.62 1740.31,1316.22 v1(1744.21,1316.22)
QDR1.Q17: U1.B10 U5.C28 | length 1804.6
  L1 TOP w5: v1(382.95,1233.42) U1.B10@402.64,1253.11 ; v1(1744.21,1394.96) U5.C28@1763.9,1375.28
  L8 SIG w3.8: v1(382.95,1233.42) 367.55,1218.02 337.2,1218.02 320.58,1234.65 320.58,1361.06 335.02,1375.5 389.33,1375.5 404.67,1390.84 404.67,1434.4 420,1449.73 1119.69,1449.73 1124.45,1454.49 1124.45,1468.5 1129.21,1473.26 1143.49,1473.26 1148.25,1468.5 1148.25,1454.49 1153.01,1449.73 1671.85,1449.73 1687.29,1434.29 1687.29,1430.11 1702.73,1414.67 1724.51,1414.67 v1(1744.21,1394.96)
QDR1.Q18: U1.B2 U5.H28 | length 1801.8
  L1 TOP w5: U1.B2@717.6,1253.11 v1(737.28,1233.42) ; v1(1941.06,1394.96) U5.H28@1960.75,1375.28
  L3 SIG w3.8: v1(737.28,1233.42) 752.68,1218.02 1127.9,1218.02 1132.66,1222.78 1132.66,1276.8 1137.42,1281.56 1151.7,1281.56 1156.46,1276.8 1156.46,1191.01 1161.22,1186.25 1175.5,1186.25 1180.26,1191.01 1180.26,1276.8 1185.02,1281.56 1199.3,1281.56 1204.06,1276.8 1204.06,1191.01 1208.82,1186.25 1223.1,1186.25 1227.86,1191.01 1227.86,1242.05 1232.62,1246.81 1246.9,1246.81 1251.66,1242.05 1251.66,1222.78 1256.42,1218.02 1581.5,1218.02 1655.73,1292.25 1910.25,1292.25 1924.71,1306.71 1924.71,1321.64 1938.49,1335.43 1942.68,1335.43 1956.46,1349.21 1956.46,1379.56 v1(1941.06,1394.96)
QDR1.Q19: U1.D3 U5.H27 | length 1801.8
  L1 TOP w5: U1.D3@678.23,1331.85 v1(697.91,1312.16) ; v1(1941.06,1355.59) U5.H27@1960.75,1335.91
  L3 SIG w3.8: v1(697.91,1312.16) 720.92,1289.16 1013.72,1289.16 1018.48,1284.4 1018.48,1230.38 1023.24,1225.62 1037.52,1225.62 1042.28,1230.38 1042.28,1284.4 1047.04,1289.16 1061.32,1289.16 1066.08,1284.4 1066.08,1230.38 1070.84,1225.62 1085.12,1225.62 1089.88,1230.38 1089.88,1284.4 1094.64,1289.16 1251.72,1289.16 1256.48,1284.4 1256.48,1252.75 1261.24,1247.99 1275.52,1247.99 1280.28,1252.75 1280.28,1284.4 1285.04,1289.16 1299.32,1289.16 1304.08,1284.4 1304.08,1230.38 1308.84,1225.62 1323.12,1225.62 1327.88,1230.38 1327.88,1284.4 1332.64,1289.16 1346.92,1289.16 1351.68,1284.4 1351.68,1271.25 1356.44,1266.49 1370.72,1266.49 1375.48,1271.25 1375.48,1284.4 1380.24,1289.16 1641.89,1289.16 1652.58,1299.85 1907.1,1299.85 1917.11,1309.86 1917.11,1331.63 v1(1941.06,1355.59)
QDR1.Q20: U1.E3 U5.G25 | length 1801.8
  L1 TOP w5: U1.E3@678.23,1371.22 v1(697.91,1351.53) ; v1(1901.69,1276.85) U5.G25@1921.38,1257.17
  L3 SIG w3.8: v1(697.91,1351.53) 694.01,1351.53 676.02,1333.55 658.15,1333.55 643.14,1318.54 643.14,1227.05 653.14,1217.05 668.07,1217.05 681.54,1203.58 681.54,1188.65 691.54,1178.65 998.16,1178.65 1002.92,1183.41 1002.92,1205.66 1007.68,1210.42 1021.96,1210.42 1026.72,1205.66 1026.72,1183.41 1031.48,1178.65 1045.76,1178.65 1050.52,1183.41 1050.52,1205.66 1055.28,1210.42 1069.56,1210.42 1074.32,1205.66 1074.32,1183.41 1079.08,1178.65 1093.36,1178.65 1098.12,1183.41 1098.12,1205.66 1102.88,1210.42 1117.16,1210.42 1121.92,1205.66 1121.92,1183.41 1126.68,1178.65 1236.16,1178.65 1240.92,1183.41 1240.92,1205.66 1245.68,1210.42 1259.96,1210.42 1264.72,1205.66 1264.72,1183.41 1269.48,1178.65 1283.76,1178.65 1288.52,1183.41 1288.52,1203.78 1293.28,1208.54 1307.56,1208.54 1312.32,1203.78 1312.32,1183.41 1317.08,1178.65 1561.74,1178.65 1643.57,1260.48 1885.32,1260.48 v1(1901.69,1276.85)
QDR1.Q21: U1.F2 U5.E30 | length 1779.1
  L1 TOP w5: U1.F2@717.6,1410.59 v1(737.28,1390.9) ; v1(1822.95,1473.7) U5.E30@1842.64,1454.02
  L4 SIG w3.8: v1(737.28,1390.9) 713.32,1414.86 691.55,1414.86 682.51,1423.9 682.51,1436.65 700.1,1454.24 853.69,1454.24 858.45,1458.99 858.45,1476.74 863.21,1481.5 877.49,1481.5 882.25,1476.74 882.25,1458.99 887.01,1454.24 901.29,1454.24 906.05,1458.99 906.05,1476.74 910.81,1481.5 925.09,1481.5 929.85,1476.74 929.85,1458.99 934.61,1454.24 948.89,1454.24 953.65,1458.99 953.65,1476.74 958.41,1481.5 972.69,1481.5 977.45,1476.74 977.45,1458.99 982.21,1454.24 996.49,1454.24 1001.25,1458.99 1001.25,1476.74 1006.01,1481.5 1020.29,1481.5 1025.05,1476.74 1025.05,1458.99 1029.81,1454.24 1101.39,1454.24 1104.9,1457.75 1112.04,1457.75 1116.8,1462.51 1116.8,1476.74 1121.56,1481.5 1135.84,1481.5 1140.6,1476.74 1140.6,1462.51 1145.36,1457.75 1159.64,1457.75 1164.4,1462.51 1164.4,1476.74 1169.16,1481.5 1183.44,1481.5 1188.2,1476.74 1188.2,1462.51 1192.96,1457.75 1207.24,1457.75 1212,1462.51 1212,1476.74 1216.76,1481.5 1231.04,1481.5 1235.8,1476.74 1235.8,1462.51 1240.56,1457.75 1254.84,1457.75 1259.6,1462.51 1259.6,1476.74 1264.36,1481.5 1278.64,1481.5 1283.4,1476.74 1283.4,1462.51 1288.16,1457.75 1302.44,1457.75 1307.2,1462.51 1307.2,1476.74 1311.96,1481.5 1326.24,1481.5 1331,1476.74 1331,1462.51 1335.76,1457.75 1350.04,1457.75 1354.8,1462.51 1354.8,1476.74 1359.56,1481.5 1373.84,1481.5 1378.6,1476.74 1378.6,1462.51 1383.36,1457.75 1397.64,1457.75 1402.4,1462.51 1402.4,1476.74 1407.16,1481.5 1421.44,1481.5 1426.2,1476.74 1426.2,1462.51 1430.96,1457.75 1445.24,1457.75 1450,1462.51 1450,1476.74 1454.76,1481.5 1469.04,1481.5 1473.8,1476.74 1473.8,1462.51 1478.56,1457.75 1492.84,1457.75 1497.6,1462.51 1497.6,1469.59 1502.36,1474.35 1516.64,1474.35 1521.4,1469.59 1521.4,1462.51 1526.16,1457.75 1807,1457.75 v1(1822.95,1473.7)
QDR1.Q22: U1.G3 U5.G29 | length 1779.1
  L1 TOP w5: U1.G3@678.23,1449.96 v1(697.91,1430.27) ; v1(1901.69,1434.33) U5.G29@1921.38,1414.65
  L4 SIG w3.8: v1(697.91,1430.27) 713.32,1445.68 884.66,1445.68 889.42,1440.92 889.42,1422.72 894.18,1417.96 908.46,1417.96 913.22,1422.72 913.22,1440.92 917.98,1445.68 932.26,1445.68 937.02,1440.92 937.02,1422.72 941.78,1417.96 956.06,1417.96 960.82,1422.72 960.82,1440.92 965.58,1445.68 979.86,1445.68 984.62,1440.92 984.62,1422.72 989.38,1417.96 1003.66,1417.96 1008.42,1422.72 1008.42,1440.92 1013.18,1445.68 1027.46,1445.68 1032.22,1440.92 1032.22,1422.72 1036.98,1417.96 1051.26,1417.96 1056.02,1422.72 1056.02,1440.92 1060.78,1445.68 1075.06,1445.68 1079.82,1440.92 1079.82,1422.72 1084.58,1417.96 1098.86,1417.96 1103.62,1422.72 1103.62,1440.92 1108.38,1445.68 1122.66,1445.68 1127.42,1440.92 1127.42,1422.72 1132.18,1417.96 1146.46,1417.96 1151.22,1422.72 1151.22,1440.92 1155.98,1445.68 1170.26,1445.68 1175.02,1440.92 1175.02,1422.72 1179.78,1417.96 1194.06,1417.96 1198.82,1422.72 1198.82,1440.92 1203.58,1445.68 1217.86,1445.68 1222.62,1440.92 1222.62,1422.72 1227.38,1417.96 1241.66,1417.96 1246.42,1422.72 1246.42,1440.92 1251.18,1445.68 1265.46,1445.68 1270.22,1440.92 1270.22,1422.72 1274.98,1417.96 1289.26,1417.96 1294.02,1422.72 1294.02,1440.92 1298.78,1445.68 1313.06,1445.68 1317.82,1440.92 1317.82,1422.72 1322.58,1417.96 1336.86,1417.96 1341.62,1422.72 1341.62,1440.92 1346.38,1445.68 1353.52,1445.68 1357.57,1449.73 1435.54,1449.73 1440.3,1444.97 1440.3,1422.72 1445.06,1417.96 1459.34,1417.96 1464.1,1422.72 1464.1,1444.97 1468.86,1449.73 1483.14,1449.73 1487.9,1444.97 1487.9,1443.96 1492.66,1439.2 1506.94,1439.2 1511.7,1443.96 1511.7,1444.97 1516.46,1449.73 1868.7,1449.73 1884.1,1434.33 v1(1901.69,1434.33)
QDR1.Q23: U1.K3 U5.J33 | length 1428.9
  L1 TOP w5: U1.K3@678.23,1568.07 v1(697.91,1587.76) ; v1(1980.43,1591.81) U5.J33@2000.12,1572.13
  L3 SIG w3.8: v1(697.91,1587.76) 720.91,1610.76 1394.08,1610.76 1398.13,1614.81 1405.27,1614.81 1410.03,1619.57 1410.03,1634.23 1414.79,1638.99 1429.07,1638.99 1433.83,1634.23 1433.83,1619.57 1438.59,1614.81 1452.87,1614.81 1457.63,1619.57 1457.63,1632.02 1462.39,1636.78 1476.67,1636.78 1481.43,1632.02 1481.43,1619.57 1486.19,1614.81 1957.43,1614.81 v1(1980.43,1591.81)
QDR1.Q24: U1.L2 U5.D33 | length 1406.2
  L1 TOP w5: U1.L2@717.6,1607.44 v1(737.28,1627.13) ; v1(1783.58,1591.81) U5.D33@1803.27,1572.13
  L4 SIG w3.8: v1(737.28,1627.13) 757.19,1607.23 906.61,1607.23 911.37,1602.47 911.37,1580.43 916.13,1575.67 930.41,1575.67 935.17,1580.43 935.17,1602.47 939.93,1607.23 954.21,1607.23 958.97,1602.47 958.97,1580.43 963.73,1575.67 978.01,1575.67 982.77,1580.43 982.77,1602.47 987.53,1607.23 1001.81,1607.23 1006.57,1602.47 1006.57,1580.43 1011.33,1575.67 1025.61,1575.67 1030.37,1580.43 1030.37,1602.47 1035.13,1607.23 1049.41,1607.23 1054.17,1602.47 1054.17,1588.22 1058.93,1583.46 1073.21,1583.46 1077.97,1588.22 1077.97,1602.47 1082.73,1607.23 1097.01,1607.23 1101.77,1602.47 1101.77,1588.22 1106.53,1583.46 1120.81,1583.46 1125.57,1588.22 1125.57,1602.47 1130.33,1607.23 1382.61,1607.23 1387.37,1602.47 1387.37,1588.22 1392.13,1583.46 1406.41,1583.46 1411.17,1588.22 1411.17,1602.47 1415.93,1607.23 1430.21,1607.23 1434.97,1602.47 1434.97,1598.05 1439.73,1593.29 1454.01,1593.29 1458.77,1598.05 1458.77,1602.47 1463.53,1607.23 1477.81,1607.23 1487.33,1597.71 1501.61,1597.71 1511.13,1607.23 1768.17,1607.23 v1(1783.58,1591.81)
QDR1.Q25: U1.N3 U5.B32 | length 1303.2
  L1 TOP w5: U1.N3@678.23,1686.18 v1(697.91,1705.87) ; v1(1704.84,1552.44) U5.B32@1724.53,1532.76
  L8 SIG w3.8: v1(697.91,1705.87) 720.91,1682.87 1011.56,1682.87 1016.32,1678.11 1016.32,1658.94 1021.08,1654.18 1035.36,1654.18 1040.12,1658.94 1040.12,1678.11 1044.88,1682.87 1059.16,1682.87 1063.92,1678.11 1063.92,1658.94 1068.68,1654.18 1082.96,1654.18 1087.72,1658.94 1087.72,1678.11 1092.48,1682.87 1106.76,1682.87 1111.52,1678.11 1111.52,1660.83 1116.28,1656.07 1130.56,1656.07 1135.32,1660.83 1135.32,1678.11 1140.08,1682.87 1211.88,1682.87 1240.55,1654.2 1674.98,1654.2 1688.47,1640.71 1688.47,1568.81 v1(1704.84,1552.44)
QDR1.Q26: U1.P3 U5.G36 | length 1406.2
  L1 TOP w3.8: v1(1901.69,1709.92) U5.G36@1921.38,1690.24
  L1 TOP w5: U1.P3@678.23,1725.55 v1(697.91,1745.24)
  L4 SIG w3.8: v1(697.91,1745.24) 715.51,1745.24 730.91,1729.84 1221.11,1729.84 1224.19,1732.92 1231.33,1732.92 1236.09,1737.68 1236.09,1752.56 1240.85,1757.32 1255.13,1757.32 1259.89,1752.56 1259.89,1737.68 1264.65,1732.92 1278.93,1732.92 1283.69,1737.68 1283.69,1752.56 1288.45,1757.32 1302.73,1757.32 1307.49,1752.56 1307.49,1737.68 1312.25,1732.92 1326.53,1732.92 1331.29,1737.68 1331.29,1752.56 1336.05,1757.32 1350.33,1757.32 1355.09,1752.56 1355.09,1737.68 1359.85,1732.92 1374.13,1732.92 1378.89,1737.68 1378.89,1742.06 1383.65,1746.82 1397.93,1746.82 1402.69,1742.06 1402.69,1737.68 1407.45,1732.92 1878.69,1732.92 v1(1901.69,1709.92)
QDR1.Q27: U1.B1 U5.F32 | length 1372.9
  L1 TOP w5: U1.B1@756.97,1253.11 v1(776.65,1233.42) ; v1(1862.32,1552.44) U5.F32@1882.01,1532.76
  L7 SIG w3.8: v1(776.65,1233.42) 1589.52,1233.42 1655.94,1299.85 1710.25,1299.85 1721.2,1310.8 1721.2,1325.73 1734.7,1339.23 1749.63,1339.23 1760.58,1350.18 1760.58,1365.11 1774.05,1378.59 1828.36,1378.59 1839.3,1389.53 1839.3,1529.42 v1(1862.32,1552.44)
QDR1.Q28: U1.C2 U5.C34 | length 1708.8
  L1 TOP w5: U1.C2@717.6,1292.48 v1(737.28,1272.79) ; v1(1744.21,1631.18) U5.C34@1763.9,1611.5
  L7 SIG w3.8: v1(737.28,1272.79) 760.91,1296.42 760.91,1436.31 771.23,1446.63 930.15,1446.63 934.91,1451.39 934.91,1485.3 939.67,1490.06 953.95,1490.06 958.71,1485.3 958.71,1451.39 963.47,1446.63 977.75,1446.63 982.51,1451.39 982.51,1485.3 987.27,1490.06 1001.55,1490.06 1006.31,1485.3 1006.31,1451.39 1011.07,1446.63 1025.35,1446.63 1030.11,1451.39 1030.11,1485.3 1034.87,1490.06 1049.15,1490.06 1053.91,1485.3 1053.91,1451.39 1058.67,1446.63 1072.95,1446.63 1077.71,1451.39 1077.71,1485.3 1082.47,1490.06 1096.75,1490.06 1101.51,1485.3 1101.51,1451.39 1106.27,1446.63 1113.41,1446.63 1155.89,1489.11 1288.48,1489.11 1293.24,1484.35 1293.24,1472.75 1298,1467.99 1312.28,1467.99 1317.04,1472.75 1317.04,1484.35 1321.8,1489.11 1383.68,1489.11 1393.2,1479.59 1407.48,1479.59 1417,1489.11 1431.28,1489.11 1440.8,1479.59 1455.08,1479.59 1464.6,1489.11 1674.04,1489.11 1689.43,1504.51 1689.43,1519.44 1698.47,1528.48 1713.41,1528.48 1728.8,1543.88 1728.8,1558.81 1742.11,1572.12 1746.3,1572.12 1759.61,1585.43 1759.61,1615.78 v1(1744.21,1631.18)
QDR1.Q29: U1.E1 U5.D32 | length 1801.8
  L1 TOP w5: U1.E1@756.97,1371.22 v1(776.65,1351.53) ; v1(1783.58,1552.44) U5.D32@1803.27,1532.76
  L3 SIG w3.8: v1(776.65,1351.53) 885.19,1351.53 889.95,1356.29 889.95,1446.77 894.71,1451.53 908.99,1451.53 913.75,1446.77 913.75,1356.29 918.51,1351.53 932.79,1351.53 937.55,1356.29 937.55,1446.77 942.31,1451.53 956.59,1451.53 961.35,1446.77 961.35,1356.29 966.11,1351.53 1075.59,1351.53 1080.35,1356.29 1080.35,1371.66 1085.11,1376.42 1099.39,1376.42 1104.15,1371.66 1104.15,1356.29 1108.91,1351.53 1123.19,1351.53 1127.95,1356.29 1127.95,1421.15 1132.71,1425.91 1146.99,1425.91 1151.75,1421.15 1151.75,1356.29 1156.51,1351.53 1163.65,1351.53 1270.4,1458.29 1711.21,1458.29 1724.52,1471.6 1724.52,1475.79 1737.83,1489.1 1750.59,1489.1 1763.9,1475.8 1763.9,1471.61 1777.2,1458.3 1789.96,1458.3 1798.98,1467.32 1798.98,1537.04 v1(1783.58,1552.44)
QDR1.Q30: U1.F1 U5.J32 | length 1450.2
  L1 TOP w5: U1.F1@756.97,1410.59 v1(776.65,1390.9) ; v1(1980.43,1552.44) U5.J32@2000.12,1532.76
  L3 SIG w3.8: v1(776.65,1390.9) 829.56,1443.81 829.56,1450.54 794.82,1485.28 794.82,1492.01 804.92,1502.11 811.65,1502.11 846.39,1467.37 853.12,1467.37 882.45,1496.7 1670.88,1496.7 1686.55,1512.37 1686.55,1516.55 1702.21,1532.22 1745.77,1532.22 1761.22,1547.67 1761.22,1551.86 1777.2,1567.84 1965.03,1567.84 v1(1980.43,1552.44)
QDR1.Q31: U1.J2 U5.A34 | length 1303.2
  L1 TOP w5: U1.J2@717.6,1528.7 v1(737.28,1548.39) ; v1(1665.47,1631.18) U5.A34@1685.16,1611.5
  L8 SIG w3.8: v1(737.28,1548.39) 756.97,1568.07 1050.2,1568.07 1054.96,1572.83 1054.96,1634.22 1059.72,1638.98 1074,1638.98 1078.76,1634.22 1078.76,1572.83 1083.52,1568.07 1097.8,1568.07 1102.56,1572.83 1102.56,1634.22 1107.32,1638.98 1121.6,1638.98 1126.36,1634.22 1126.36,1572.83 1131.12,1568.07 1145.4,1568.07 1150.16,1572.83 1150.16,1580.72 1154.92,1585.48 1169.2,1585.48 1173.96,1580.72 1173.96,1572.83 1178.72,1568.07 1602.36,1568.07 v1(1665.47,1631.18)
QDR1.Q32: U1.K1 U5.C35 | length 1335.9
  L1 TOP w5: U1.K1@756.97,1568.07 v1(776.65,1587.76) ; v1(1744.21,1670.55) U5.C35@1763.9,1650.87
  L7 SIG w3.8: v1(776.65,1587.76) 1078.32,1587.76 1137.2,1646.64 1144.34,1646.64 1149.1,1641.88 1149.1,1551.4 1153.86,1546.64 1168.14,1546.64 1172.9,1551.4 1172.9,1641.88 1177.66,1646.64 1191.94,1646.64 1196.7,1641.88 1196.7,1601.06 1201.46,1596.3 1215.74,1596.3 1220.5,1601.06 1220.5,1641.88 1225.26,1646.64 1720.3,1646.64 v1(1744.21,1670.55)
QDR1.Q33: U1.L1 U5.E34 | length 1142.1
  L1 TOP w5: U1.L1@756.97,1607.44 v1(776.65,1627.13) ; v1(1822.95,1631.18) U5.E34@1842.64,1611.5
  L4 SIG w3.8: v1(776.65,1627.13) 788,1615.78 1588.59,1615.78 1593.35,1620.54 1593.35,1631.14 1598.11,1635.9 1612.39,1635.9 1617.15,1631.14 1617.15,1620.54 1621.91,1615.78 1807.55,1615.78 v1(1822.95,1631.18)
QDR1.Q34: U1.M2 U5.A32 | length 1303.2
  L1 TOP w5: U1.M2@717.6,1646.81 v1(737.28,1666.5) ; v1(1665.47,1552.44) U5.A32@1685.16,1532.76
  L8 SIG w3.8: v1(737.28,1666.5) 757.2,1646.58 1143.49,1646.58 1148.25,1641.82 1148.25,1597.84 1153.01,1593.08 1167.29,1593.08 1172.05,1597.84 1172.05,1670.51 1176.81,1675.27 1191.09,1675.27 1195.85,1670.51 1195.85,1622.18 1200.61,1617.42 1214.89,1617.42 1219.65,1622.18 1219.65,1641.82 1224.41,1646.58 1671.85,1646.58 1680.87,1637.56 1680.87,1567.84 v1(1665.47,1552.44)
QDR1.Q35: U1.P1 U5.K36 | length 1335.9
  L1 TOP w5: U1.P1@756.97,1725.55 v1(776.65,1745.24) ; v1(2019.8,1709.92) U5.K36@2039.49,1690.24
  L7 SIG w3.8: v1(776.65,1745.24) 1187.19,1745.24 1199.49,1732.94 1206.63,1732.94 1211.39,1737.7 1211.39,1744.97 1216.15,1749.73 1230.43,1749.73 1235.19,1744.97 1235.19,1737.7 1239.95,1732.94 1996.79,1732.94 v1(2019.8,1709.92)
QDR1.RDN: U1.A8 U5.C29 | length 55.7
  L1 TOP w5: v1(461.69,1194.05) U1.A8@481.38,1213.74 ; v1(1744.21,1434.33) U5.C29@1763.9,1414.65
QDR1.WRN: U1.A4 U5.C31 | length 55.7
  L1 TOP w5: U1.A4@638.86,1213.74 v1(658.54,1194.05) ; v1(1744.21,1513.07) U5.C31@1763.9,1493.39
QDR1_TCK: U1.R2 | length 27.8
  L1 TOP w5: U1.R2@717.6,1764.92 v1(737.28,1784.61)
QDR1_TDI: U1.R11 | length 27.8
  L1 TOP w5: v1(343.58,1784.61) U1.R11@363.27,1764.92
QDR1_TDO: U1.R1 | length 27.8
  L1 TOP w5: U1.R1@756.97,1764.92 v1(776.65,1784.61)
QDR1_TMS: U1.R10 | length 27.8
  L1 TOP w5: v1(382.95,1784.61) U1.R10@402.64,1764.92
QDR01_VREF: U1.H2 U1.H10 U2.H2 U2.H10 U5.D35 U5.E22 U5.F29 U5.G13 U5.H16 U5.H19 U5.H25 U5.H29 U5.J31 U5.K15 U5.L14 U5.M23 | length 445.4
  L1 TOP w5: v1(382.95,1469.64) U1.H10@402.64,1489.33 ; v1(388.23,607.12) U2.H10@407.91,626.81 ; U1.H2@717.6,1489.33 v1(737.28,1469.64) ; U2.H2@722.88,626.81 v1(742.56,607.12) ; v1(1783.58,1670.55) U5.D35@1803.27,1650.87 ; v1(1822.95,1158.74) U5.E22@1842.64,1139.06 ; v1(1862.32,1434.33) U5.F29@1882.01,1414.65 ; v1(1901.69,765.04) U5.G13@1921.38,784.72 ; v1(1941.06,883.15) U5.H16@1960.75,902.83 ; v1(1941.06,1001.26) U5.H19@1960.75,1020.94 ; v1(1941.06,1276.85) U5.H25@1960.75,1257.17 ; v1(1941.06,1434.33) U5.H29@1960.75,1414.65 ; v1(1980.43,1513.07) U5.J31@2000.12,1493.39 ; v1(2019.8,843.78) U5.K15@2039.49,863.46 ; v1(2059.17,804.41) U5.L14@2078.86,824.09 ; v1(2098.54,1198.11) U5.M23@2118.23,1178.43
QDR01_VTT: 
QDR2.A0: U5.AK37 | length 27.8
  L1 TOP w5: U5.AK37@2826.89,1729.61 v1(2846.58,1749.29)
QDR2.A1: U5.AG34 | length 27.8
  L1 TOP w5: U5.AG34@2708.78,1611.5 v1(2728.47,1631.18)